# EAGLE board sensor_vol_div_eagle3 (EAGLE 7.5.0)
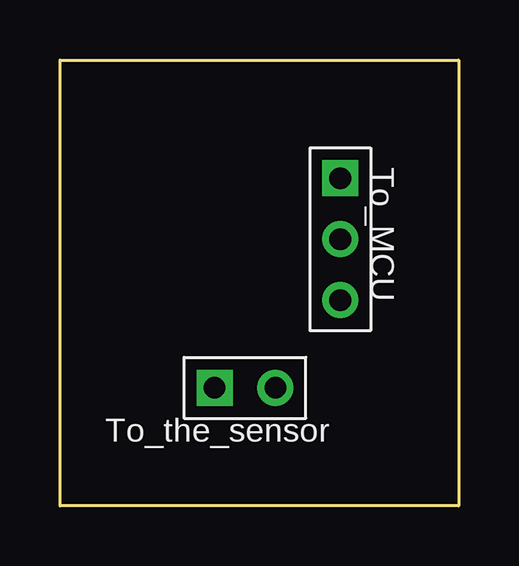
[diagram p0: board, top side]
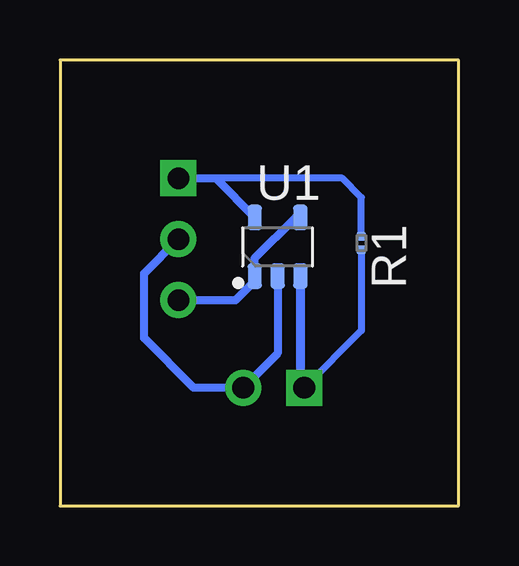
[diagram p1: board, bottom side, seen from below]

Size 16.61 x 18.6 mm. Coordinates in mm from the lower left corner, seen from the top.
Outline: 0,18.6 16.61,18.6 16.61,0 0,0 0,18.6
Copper layers (1*16): Top 0.035mm / dielectric 1.5mm / Bottom 0.035mm
Design rules "default *": minimum track width 10mil, minimum drill 0.61mm, track to track 8mil, track to pad 8mil, pad to pad 8mil, via to via 8mil, smd to smd 8mil, copper to edge 40mil, drill to drill 8mil, minimum pad ring 0mil, minimum via ring 8mil, stop-mask expansion 2mil, vias tented up to drill 19mil, thermal gap 10mil
Net classes: 0 Default: width 0.33 mm, clearance 0.33 mm

## Footprints (pad centres in the part's own frame; a part is rotated, then mirrored left to right if it is on the bottom)
RES_0603_M = smd 0.37 x 0.38: 1 -0.29,0; 2 0.29,0
HDR-1x3 = drill 0.9 pad 1.5 square: 1 -2.54,0 | drill 0.9 pad 1.5: 2 0,0; 3 2.54,0
HDR-1x2 = drill 0.9 pad 1.5 square: 1 -1.27,0 | drill 0.9 pad 1.5: 2 1.27,0
SOT23-5P95_280X100L45X40N = smd 0.61 x 1.07: 1 -0.95,-1.225; 2 0,-1.225; 3 0.95,-1.225; 4 0.95,1.225; 5 -0.95,1.225

## Placement (x,y rotation side)
R1  1.78MOhm  [RES_0603_M]  4.06,10.97 270 bottom
To_MCU  HDR-1X3  [HDR-1x3]  11.68,11.13 270 top
To_the_sensor  HDR-1X2  [HDR-1x2]  7.71,4.94 0 top
U1  AD8615AUJZ-REEL  [SOT23-5P95_280X100L45X40N]  7.55,10.81 0 bottom

## Library data of the parts
R1 = common; UNIQUE_NAME: RES_0603_METRIC
To_MCU = common; UNIQUE_NAME: HDR-1x3
To_the_sensor = common; UNIQUE_NAME: HDR-1x2
U1 = common; DATASHEET: http://datasheets.diptrace.com/analog_devices/AD8615_8616_8618.pdf; MANUFACTURER: Analog Devices; PART_NUMBER_(DIGI-KEY): AD8615AUJZ-REELDKR-ND; UNIQUE_NAME: ANALOG_UJ-5

## Nets
Net_0: To_MCU.3 U1.1 U1.4
Net_1: R1.2 To_the_sensor.1 U1.3
Net_2: R1.1 To_MCU.1 U1.5
Net_3: To_MCU.2 To_the_sensor.2 U1.2

## Tracks (layer width: path | path; a pad name or v marks a point on that pad's centre or on a via)
Net_0
  Bottom 0.33: To_MCU.3 9.3,8.59 8.5,9.38 U1.1 8.5,10.34 6.8,12.04 U1.4
Net_1
  Bottom 0.3: R1.2 4.06,7.32 To_the_sensor.1
  Bottom 0.381: U1.3 6.6,5.1 To_the_sensor.1
Net_2
  Bottom 0.3: R1.1 4.06,12.87 4.85,13.67 10.13,13.67
  Bottom 0.33: To_MCU.1 10.13,13.67 U1.5
Net_3
  Bottom 0.33: To_MCU.2 13.11,9.7 13.11,7 11.04,4.94 To_the_sensor.2 7.55,6.37 U1.2

## Text on the board
tPlace: To_MCU | To_the_sensor
bPlace: U1 | R1